# EAGLE board POWER SUPPLY (EAGLE 6.1)
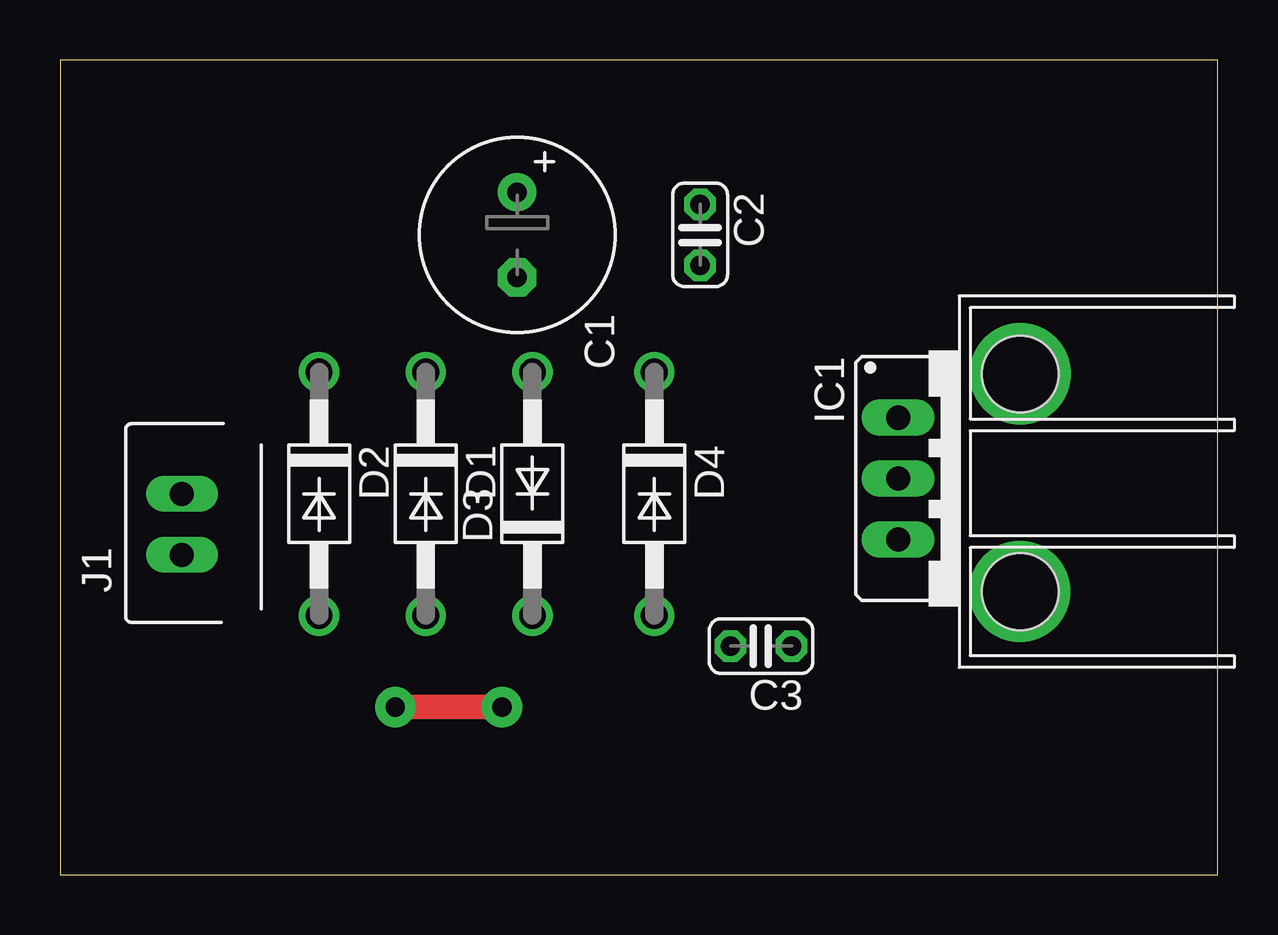
[diagram p0: board, top side]
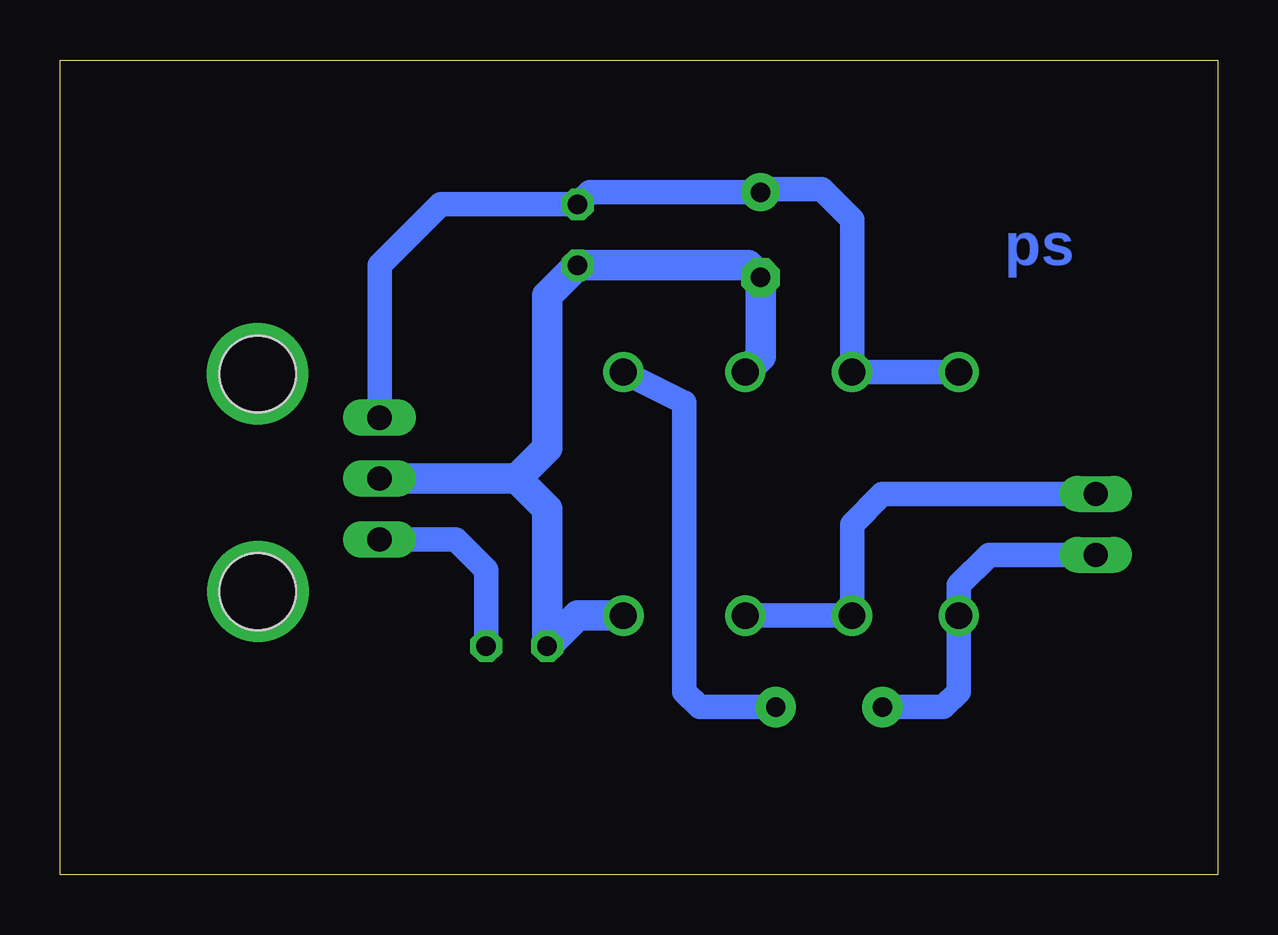
[diagram p1: board, bottom side, seen from below]

Size 48.24 x 33.96 mm. Coordinates in mm from the lower left corner, seen from the top.
Outline: 0,0 48.24,0 48.24,33.96 0,33.96 0,0
Copper layers (1*16): Top 0.035mm / dielectric 1.5mm / Bottom 0.035mm
Design rules: minimum track width 10mil, minimum drill 24mil, track to track 8mil, track to pad 8mil, pad to pad 8mil, via to via 8mil, smd to smd 8mil, copper to edge 40mil, drill to drill 8mil, minimum pad ring 10mil, minimum via ring 8mil, stop-mask expansion 4mil, vias tented up to drill 0mil, thermal gap 10mil

## Footprints (pad centres in the part's own frame; a part is rotated, then mirrored left to right if it is on the bottom)
E3,5-8 = drill 0.813 pad 1.6: + -1.778,0 | drill 0.813 pad 1.6 octagon: - 1.778,0
C025-024X044 = drill 0.813 octagon: 1 -1.27,0; 2 1.27,0
DO41-10 = drill 1.118: A 5.08,0; C -5.08,0
78XXS = drill 1.016 long: GND 0,-2.54; IN -2.54,-2.54; OUT 2.54,-2.54
JP2 = drill 1 long: 1 2.54,0; 2 5.08,0
HEATSINK = drill 3.2: P$1 3.25,4.45; P$2 12.33,4.43 | hole 3.2: 3.263,4.445; 12.335,4.445

## Placement (x,y rotation side)
C1  1000uF  [E3,5-8]  19.05,26.67 270 top
C2  0.1uf  [C025-024X044]  26.67,26.67 270 top
C3  0.1uf  [C025-024X044]  29.21,9.53 180 top
D1  1N4004  [DO41-10]  15.24,15.88 270 top
D2  1N4004  [DO41-10]  10.79,15.88 270 top
D3  1N4004  [DO41-10]  19.68,15.88 90 top
D4  1N4004  [DO41-10]  24.77,15.88 270 top
IC1  [78XXS]  37.47,16.51 270 top
J1  JP2E  [JP2]  5.08,10.79 90 top
U$1  HSQ  [HEATSINK]  35.56,24.13 270 top

## Library data of the parts
C1-C3 = resistor
D1-D4 = diode
IC1 = v-reg
J1 = relimate
U$1 = HEATSINK

## Nets
+5V: C3.1 IC1.OUT
GND: C1.- C2.2 C3.2 D3.A D4.A IC1.GND
N$1: C1.+ C2.1 D1.C D2.C IC1.IN
N$2: D1.A D3.C J1.2
N$3: D2.A D4.C J1.1

## Tracks (layer width: path | path; a pad name or v marks a point on that pad's centre or on a via)
+5V
  Bottom 1.016: C3.1 30.48,12.7 31.75,13.97 IC1.OUT
GND
  Bottom 1.27: D4.A 26.67,10.79 C3.2 27.94,15.24 29.21,16.51 | IC1.GND 29.21,16.51 | 29.21,16.51 27.94,17.78 27.94,24.13 C2.2 19.56,25.4 C1.- 19.05,21.59 D3.A
N$1
  Bottom 1.016: D2.C D1.C 15.24,27.3 16.51,28.57 18.92,28.57 C1.+ 26.16,28.45 C2.1 32.38,27.94 34.92,25.4 IC1.IN
N$2
  Bottom 1.016: J1.2 13.97,15.88 15.24,14.61 D1.A D3.C
N$3  (via drill 0.8 pad 1.68)
  Top 1.016: v13.97,6.99 v18.41,6.99
  Bottom 1.016: J1.1 9.53,13.34 10.79,12.06 D2.A 10.79,7.62 11.43,6.99 v13.97,6.99 | D4.C 22.23,19.68 22.23,7.62 21.59,6.99 v18.41,6.99

## Text on the board
Bottom: ps